# Altium PCB CH32V208W-NFC-R0-1v5.PcbDoc (part 2 of 2)
Units mil, origin at the board's own origin, x right, y up, seen from the top; angles counter-clockwise.
Board outline 2756.07 x 4438.27 mil, 2 copper layers (Top Layer, Bottom Layer); 80 components, 93 nets, 303 pads, 633 vias.
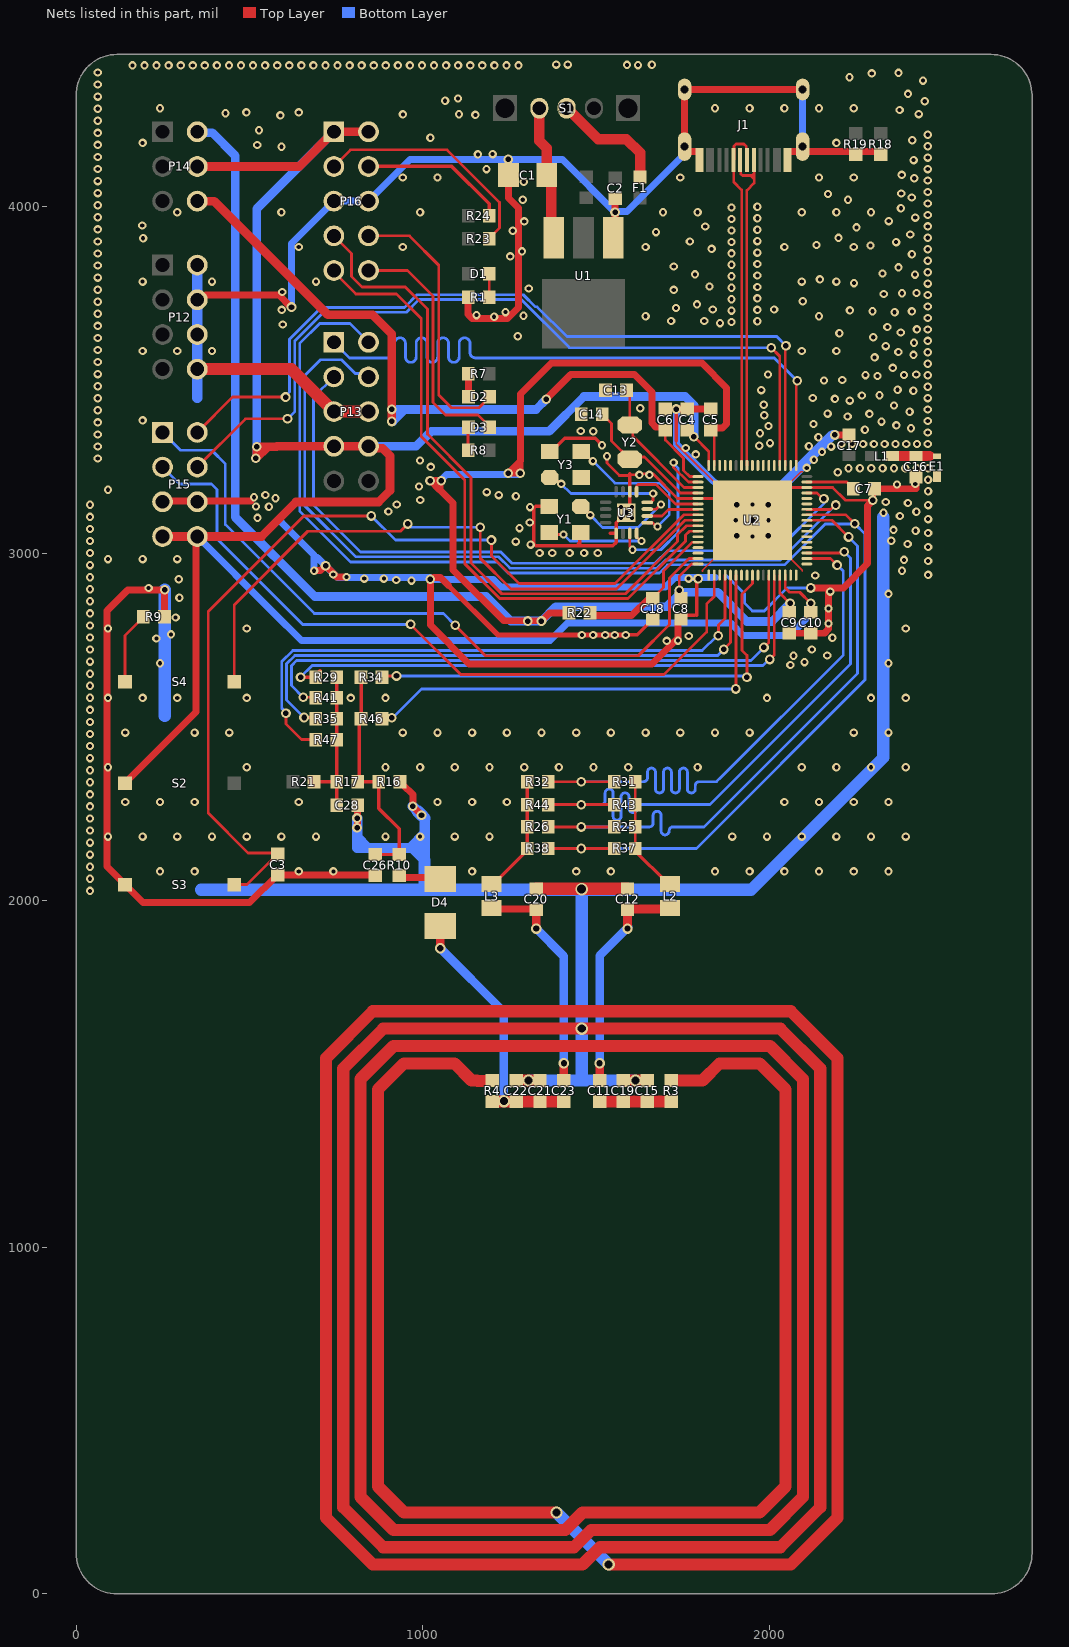
[diagram p2: the nets of this part, all layers, seen from the top]

## Via types
v1: diameter 24, hole 12, Top Layer to Bottom Layer, tented both sides, 537 vias
v2: diameter 28, hole 16, Top Layer to Bottom Layer, tented both sides, 80 vias
v3: diameter 35.43, hole 23.62, Top Layer to Bottom Layer, tented both sides, 6 vias
v4: diameter 30, hole 18, Top Layer to Bottom Layer, tented both sides, 5 vias
v5: diameter 20, hole 12, Top Layer to Bottom Layer, tented both sides, 4 vias
v6: diameter 36, hole 26, Top Layer to Bottom Layer, tented both sides, 1 vias

## Nets (pads, with @x,y where several pads share a name; then routed paths per layer and width w, separated by ;. In a path a pad name is that pad's centre, name@x,y a point inside that pad or via, vN(x,y) a via of type N, cw(c..) or ccw(c..) an arc to the next point about the centre after c; other vN are vias at no path point) (continued)
GND: C1.2 C2.2 C3.1 C4.2 C5.1 C6.2 C7.2 C8.2 C9.2 C10.1 C12.1 C13.1 C14.1 C15.1 C16.1 C17.1 C18.2 C19.1 C20.2 C21.2 C22.2 C26.1 C28.1 E1.0 J1.0 J1.A1 J1.B1 P12.2 P12.4 P12.6 P12.8 P13.5 P13.6 P15.5 P15.6 P16.5 P16.6 R1.1 R3.2 R4.2 R9.1 R16.1 R18.2 R19.2 S3.1 U1.1 U2.0 U2.5 U2.49 U3.0 U3.6 U3.13 Y1.2 Y1.4 Y3.2 Y3.4 | length 40721.1
  Top Layer w5: 1730.65,3324.41 1730.65,3314.41 1886.93,3158.13 U2.0@1904.91,3140.16 U2.0@1949.92,3095.14 ; 1806,2948.77 1806,2951.22 U2.0@1904.91,3050.12 U2.0@1949.92,3095.14 ; 2093.84,2948.77 2093.84,2951.22 U2.0@1994.94,3050.12 U2.0@1949.92,3095.14 ; 2094.89,3235.06 2089.84,3235.06 2044.41,3189.63 U2.0@1994.94,3140.16 U2.0@1949.92,3095.14
  Top Layer w8: v1(1530.59,3279.88) 1530.59,3260.07 1566.17,3224.48 1596.43,3224.48 ; 1596.43,3226.12 v1(1623.91,3226.12) ; 1637.61,3229.16 1662.93,3229.16 1733.96,3158.13 U2.5@1793.14,3158.13 U2.0@1886.93,3158.13 ; U2.0@2044.41,3189.63 U2.49@2106.7,3189.63 2181.11,3189.63 2217.96,3152.78 v2(2296.85,3152.78) 2301.54,3157.46 C7.2@2301.54,3186.12
  Top Layer w10: 1073.17,2907.57 1078.39,2907.57 ; Y1.2@1364.1,3135.19 1324.83,3135.19 1318.97,3129.33 1318.97,3027.84 1324.83,3021.98 1443.89,3021.98 ; Y3.4@1365.79,3292.9 1369.72,3292.9 1408.39,3331.57 1496.22,3331.57 v1(1516.09,3311.7) ; Y1.4@1454.65,3060.39 1459.87,3055.17 1451.5,3046.8 1451.5,3029.6 1443.89,3021.98 ; 1539.75,3057.33 U3.13@1557.06,3057.33 ; v1(1584.61,2764.64) 1617.33,2764.64 1647.89,2795.2 1647.89,2796.19 1661.2,2809.49 C18.2@1662.18,2809.49 ; 1596.43,3229.16 1596.43,3226.12 1596.43,3224.48 U3.6@1596.43,3177.5 1596.43,3127.26 U3.0@1586.58,3117.42 1557.06,3087.89 U3.13@1557.06,3057.33 ; 1730.65,3324.41 v2(1730.65,3415.75) v2@1730.65,3425.75 ; C8.2@1755.91,2809.49 1755.91,2818.64 1758.2,2820.93 1783.28,2820.93 ; 1789.14,2820.93 v2@1789.14,2926.72 ; 1443.89,3021.98 1547.79,3021.98 1557.06,3031.25 U3.13@1557.06,3057.33
  Top Layer w15: 1073.17,2907.57 1216.1,2764.64 v1(1458.16,2764.64) v1(1490.59,2764.64) v1(1525.64,2764.64) v1(1553.11,2764.64) v1@1578.91,2764.64
  Top Layer w20: P15.5@249.55,3148.48 252.16,3151.09 503.84,3151.09 ; R9.1@254.77,2817.08 v2@254.77,2893.94 ; v2(255.54,2894.71) v2@254.77,2893.94 ; P12.4@349.55,3730.82 360.37,3730.82 373.63,3744.07 584.72,3744.07 618.96,3709.83 v2(621.13,3709.83) ; v1(686.26,2949.8) 704.92,2949.8 v2@717.95,2962.83 ; v2(719.29,2964.16) v1@740.75,2942.7 ; v1@740.75,2940.03 v1@740.75,2942.7 ; v1(779.6,2931.83) 751.62,2931.83 v1@740.75,2942.7 ; v2(810.25,2208.78) 811.04,2209.56 C28.1@811.04,2272.56 ; v2(810.25,2236.81) 811.04,2237.6 C28.1@811.04,2272.56 ; C28.1@811.82,2273.35 C28.1@811.04,2272.56 ; C26.1@862.83,2072.39 C3.1@581.24,2072.39 580.26,2072.39 500.61,1992.74 193.42,1992.74 S3.1@141.31,2044.86 89.55,2096.61 89.55,2834.38 149.12,2893.94 v2@254.77,2893.94 ; R16.1@933.62,2341.44 933.62,2340.46 941.93,2332.15 942.91,2332.15 970.95,2304.12 v2(970.95,2270.38) 995.86,2245.47 v2(995.86,2245.24) ; v2(1021.23,2925.03) 1021.23,2792.86 1132.98,2681.1 1659.76,2681.1 1734.8,2756.15 1734.8,2801.19 1743.11,2809.49 C8.2@1743.91,2809.49 ; v2@1030.23,2930.03 1050.7,2930.03 1073.17,2907.57 ; R1.1@1130.28,3738.12 1130.28,3689.11 1141.99,3677.39 1244.27,3677.39 1275.92,3709.04 1275.92,3995.02 1246.19,4024.75 C1.2@1246.19,4091.03 ; v2(1246.19,4135.34) C1.2@1246.19,4091.03 ; C1.2@1246.88,4090.34 C1.2@1246.19,4091.03 ; U1.1@1548.91,3910.12 1553.91,3915.12 v2(1553.91,3983.19) C2.2@1553.91,4022.12 ; v2(1730.65,3415.75) C4.2@1762.47,3415.75 C5.1@1829.91,3415.75 ; J1.B1@1797.41,4134.12 1797.41,4156.76 1795.6,4158.57 1763.25,4158.57 1754.3,4167.52 J1.0@1754.3,4172.31 J1.0@1754.3,4336.88 J1.0@2094.46,4336.88 ; J1.A1@2051.35,4134.12 2051.35,4156.76 2053.16,4158.57 J1.0@2085.51,4158.57 ; C9.2@2055.91,2769.49 2157.35,2769.49 2169.07,2781.21 v1(2169.07,2840.69) v1@2169.07,2900.18 ; J1.0@2094.46,4172.31 2094.46,4167.52 J1.0@2085.51,4158.57 ; v2@2127.91,2900.18 v1@2169.07,2900.18 ; v2(2187.29,3341.12) 2187.29,3340.75 C17.1@2228.41,3340.75 ; v2(2296.85,3152.78) 2296.85,3152.03 2281.88,3137.06 2281.88,2970.02 2212.04,2900.18 v1@2169.07,2900.18 ; C7.2@2301.54,3186.12 2421.34,3186.12 C16.1@2421.34,3219.66 ; R18.2@2319.91,4149.49 2311.6,4157.8 2086.28,4157.8 J1.0@2085.51,4158.57
  Top Layer w35: P12.8@349.55,3530.82 620.82,3530.82 P13.5@743.16,3408.48 P13.6@843.16,3408.48 ; 1156,1480 1156.12,1480 1157.05,1479.07 1186.24,1479.07 1186.66,1479.49 1199.51,1479.49 R4.2@1200.32,1480.3 ; 1156,1480.3 1140.32,1480.3 1090.95,1529.67 945.32,1529.67 870.32,1454.67 870.32,309.67 945.32,234.67 v3(1385.32,234.67) ; C22.2@1268.99,1480.3 C21.2@1337.65,1480.3 ; C20.2@1326.51,2033.08 C12.1@1589.84,2033.08 ; v3(1535.32,84.67) 2060.32,84.67 2195.32,219.67 2195.32,1544.67 2060.32,1679.67 855.32,1679.67 720.32,1544.67 720.32,219.67 855.32,84.67 1460.32,84.67 1510.32,134.67 2030.32,134.67 2145.32,249.67 2145.32,1514.67 2030.32,1629.67 v3(1457.82,1629.67) 885.32,1629.67 770.32,1514.67 770.32,249.67 885.32,134.67 1435.32,134.67 1485.32,184.67 2000.32,184.67 2095.32,279.67 2095.32,1484.67 2000.32,1579.67 915.32,1579.67 820.32,1484.67 820.32,279.67 915.32,184.67 1410.32,184.67 1460.32,234.67 1970.32,234.67 2045.32,309.67 2045.32,1454.67 1970.32,1529.67 1855.32,1529.67 1805.95,1480.3 R3.2@1715.32,1480.3 ; C19.1@1577.99,1480.3 C19.1@1594.62,1480.3 ; v3@1617,1480 v3(1613,1480) 1594.92,1480 C19.1@1594.62,1480.3 ; C15.1@1646.65,1480.3 C19.1@1594.62,1480.3
  Bottom Layer w8: 1875.29,2935.12 1927.19,2883.23 1927.19,2856.47 1949.62,2834.04 1983.84,2834.04 2049.98,2900.18 v2(2117.91,2900.18) v2@2127.91,2900.18
  Bottom Layer w20: 592.64,3090.81 592.64,3088.14 686.26,2994.53 v1(686.26,2949.8) ; v2(621.13,3709.83) 621.13,3893.12 P16.5@743.16,4015.15 P16.6@843.16,4015.15 963.35,4135.34 v2(1246.19,4135.34) 1401.75,4135.34 v2(1553.91,3983.19) 1555.44,3984.72 1588.36,3984.72 1754.3,4150.66 J1.0@1754.3,4172.31 ; 695.32,2988.13 v2(719.29,2964.16) 753.42,2930.03 923.01,2930.03 v2@1021.23,2930.03 ; 1002.85,2150.35 1004.95,2148.25 ; v2@1021.23,2928.73 1024.92,2925.03 1202.84,2925.03 1225.47,2902.41 1699.09,2902.41 1726.29,2929.61 v1@1762.11,2929.61 ; v2(1730.65,3415.75) 1730.65,3314.41 1773.21,3271.85 U2.0@1904.91,3140.16 ; v1(1765.91,2926.9) 1764.82,2926.9 v1@1762.11,2929.61 ; 1842.82,2929.61 1793.14,2929.61 v1@1762.11,2929.61 ; J1.0@2094.46,4172.31 J1.0@2094.46,4336.88
  Bottom Layer w30: 349.55,3448.48 P12.8@349.55,3530.82 P12.6@349.55,3630.82 P12.4@349.55,3730.82 P12.2@349.55,3830.82 ; v2(810.25,2236.81) v2(810.25,2208.78) 810.25,2180.75 ; v2(970.95,2270.38) 984.25,2257.08 ; 1002.85,2150.35 969.96,2150.35 ; v2@1004.95,2236.38 1004.95,2192.31 ; U2.0@1994.94,3140.16 1994.94,3153.96 2182.1,3341.12 v2(2187.29,3341.12) ; 810.25,2180.75 840.64,2150.35 ; 810.25,2180.75 810.25,2150.35 840.64,2150.35 ; 840.64,2150.35 962.99,2150.35 ; 962.99,2150.35 969.96,2150.35 ; 962.99,2150.35 1004.95,2192.31 ; 969.96,2150.35 1004.95,2115.37 1004.95,2148.25 1004.95,2192.31
  Bottom Layer w35: 255.54,2531.18 v2(255.54,2894.71) ; 359.99,2030.22 1004.95,2030.22 ; 984.25,2257.08 995.98,2245.35 v2@1004.95,2236.38 ; 1004.95,2115.37 1004.95,2030.22 ; v3@1310.22,1480.12 1457.64,1480.12 1457.82,1480.3 ; v3(1385.32,234.67) v3(1535.32,84.67) ; v6@1457.82,2030.22 v3(1457.82,1629.67) 1457.82,1480.3 ; v3(1613,1480) 1612.7,1480.3 1457.82,1480.3 ; v1@2326.98,3105.11 2326.98,2410.95 1946.24,2030.22 1459.85,2030.22 1458.28,2031.79 1458.09,2031.79 1457.82,2031.52 1457.55,2031.79 1457.36,2031.79 1455.79,2030.22 1004.95,2030.22
  other v1: 40.19,2026.9 40.19,2061.67 241.91,2083.12 341.91,2083.12 641.91,2083.12 741.91,2083.12 1141.91,2083.12 1441.91,2083.12 1541.91,2083.12 1841.91,2083.12 1941.91,2083.12 2041.91,2083.12 2141.91,2083.12 2241.91,2083.12 2341.91,2083.12 40.19,2096.45 40.19,2131.23 40.19,2166.01 91.91,2183.12 191.91,2183.12 291.91,2183.12 391.91,2183.12 491.91,2183.12 591.91,2183.12 691.91,2183.12 891.91,2183.12 991.91,2183.12 1091.91,2183.12 1191.91,2183.12 1891.91,2183.12 1991.91,2183.12 2091.91,2183.12 2191.91,2183.12 2291.91,2183.12 2391.91,2183.12 40.19,2200.79 40.19,2235.56 40.19,2270.34 141.91,2283.12 241.91,2283.12 341.91,2283.12 641.91,2283.12 1041.91,2283.12 1141.91,2283.12 1241.91,2283.12 2041.91,2283.12 2141.91,2283.12 2241.91,2283.12 2341.91,2283.12 40.19,2305.12 40.19,2339.9 40.19,2374.68 91.91,2383.12 491.91,2383.12 891.91,2383.12 991.91,2383.12 1091.91,2383.12 1191.91,2383.12 1291.91,2383.12 1391.91,2383.12 1491.91,2383.12 1591.91,2383.12 1791.91,2383.12 2091.91,2383.12 2191.91,2383.12 2291.91,2383.12 2391.91,2383.12 40.19,2409.46 40.19,2444.23 40.19,2479.01 141.91,2483.12 341.91,2483.12 441.91,2483.12 941.91,2483.12 1041.91,2483.12 1141.91,2483.12 1241.91,2483.12 1341.91,2483.12 1441.91,2483.12 1541.91,2483.12 1641.91,2483.12 1741.91,2483.12 1841.91,2483.12 1941.91,2483.12 2241.91,2483.12 2341.91,2483.12 40.19,2513.79 40.19,2548.57 40.19,2583.35 91.91,2583.12 191.91,2583.12 291.91,2583.12 491.91,2583.12 791.91,2583.12 891.91,2583.12 1991.91,2583.12 2291.91,2583.12 2391.91,2583.12 40.19,2618.12 40.19,2652.9 2059.3,2677.93 241.91,2683.12 2341.91,2683.12 2099.83,2686.28 40.19,2687.68 2068.24,2704.76 2165.4,2705.35 40.19,2722.46 2121.29,2722.64 1702.73,2747.52 1735.26,2748.18 231.5,2754.39 2180.3,2756.62 40.19,2757.24 1766.47,2761.46 273.71,2766.21 91.91,2783.12 491.91,2783.12 2391.91,2783.12 40.19,2792.02 2168.97,2797.74 287.08,2815.12 40.19,2826.79 40.19,2861.57 297.83,2871.98 2341.91,2883.12 2174.34,2889.54 40.19,2896.35 209.38,2899.81 966.85,2921.16 923.01,2922.97 295.97,2925.17 830.62,2926.95 887.32,2927.03 40.19,2931.13 2130.77,2935.94 2456.27,2937.7 741.52,2938.8 2380.82,2949.88 40.19,2965.91 2456.27,2977.91 2387,2981.09 91.91,2983.12 191.91,2983.12 291.91,2983.12 40.19,3000.68 1336.53,3000.81 1372.62,3000.81 1423,3000.81 1464.73,3000.81 1503.83,3000.81 2456.27,3018.13 1310.49,3024.94 2397.23,3026.97 1267.66,3033.7 40.19,3035.46 2350.29,3036.27 1949.92,3048.14 2456.27,3058.35 2420.23,3064.8 2356.46,3067.49 40.19,3070.24 1278.24,3072.48 1307.87,3088.9 1901.92,3095.14 1995.92,3095.14 2456.27,3098.56 523.11,3102.1 40.19,3105.02 2374.89,3107.4 2327.94,3116.71 2422.57,3119.6 900.28,3120.6 1308.59,3133.04 555.97,3134.39 518.89,3134.95 2456.27,3138.78 40.19,3139.8 924.69,3140.75 1949.92,3141.14 2397.89,3145.24 2334.12,3147.92 992.08,3153.7 574.97,3158.71 512.8,3161.55 1267.94,3164.45 1218.46,3167.59 545.7,3168.21 1183.91,3176.23 2456.27,3178.99 91.91,3183.12 988.92,3192.4 2366.62,3198.09 2419.06,3199.84 2456.27,3212 1652.7,3226.12 2195.95,3233.62 2226.79,3245.01 2259.57,3245.01 2292.36,3245.01 2325.14,3245.01 2357.92,3245.01 2390.7,3245.01 2423.49,3245.01 2456.27,3245.01 2106.7,3246.27 1022.69,3249.03 991.81,3267.32 2127.05,3269.72 62.58,3273.06 1786.45,3285.08 2150.21,3292.29 1757.78,3303.7 2176.73,3307.53 62.58,3307.84 2112.57,3308.41 1969.55,3309.97 2206.81,3315.26 2237.86,3315.26 2268.92,3315.26 2299.97,3315.26 2331.02,3315.26 2362.08,3315.26 2393.13,3315.26 2424.18,3315.26 2455.23,3315.26 2000.36,3317.53 2140,3334.6 62.58,3342.62 1971.89,3346 2455.23,3348.27 1455.06,3352.47 1490.93,3351.66 2274.03,3356.01 2407.2,3360.36 1996.45,3366.9 2364.89,3368.77 2125.9,3372.92 62.58,3377.4 2322.03,3379.48 2455.23,3381.27 191.91,3383.12 2224.33,3394.09 1984.17,3397.98 2287.06,3402.04 2166.58,3402.68 2403.05,3407.85 62.58,3412.17 2455.23,3414.28 1626.57,3418.19 2357.82,3426.14 1982.34,3428.02 2230.53,3440.05 2187.53,3445.13 62.58,3446.95 2455.23,3447.29 2123.76,3447.81 2265.43,3455.13 2316.39,3455.61 2413.73,3468.4 1975.27,3470.28 2368.49,3471.63 2455.23,3480.3 62.58,3481.73 2156.26,3497.99 2208.7,3499.73 2310.19,3510.88 2455.23,3513.31 2276.02,3513.67 2387.03,3513.76 1994.7,3515.58 62.58,3516.51 2422.01,3515.65 2354.17,3534.56 2455.23,3546.32 62.58,3551.29 2302.18,3564.74 2414.14,3572.09 2455.23,3579.33 2370.6,3580.35 191.91,3583.12 291.91,3583.12 391.91,3583.12 2091.91,3583.12 2191.91,3583.12 62.58,3586.07 2334.44,3597.16 2415.45,3606.87 2455.23,3612.34 62.58,3620.84 2298.26,3622.65 1273.46,3625.5 2200.59,3634.25 2377.36,3636.3 2423.98,3645.59 2455.23,3645.35 2338.95,3652.42 62.58,3655.62 596.13,3659.44 1856.31,3663.59 1889.36,3666.54 1715.49,3669.5 1964.19,3668.77 1811.2,3669.64 2455.23,3678.36 1205.33,3681.88 1641.91,3683.12 2141.91,3683.12 1289.9,3685.01 1154.44,3686.58 62.58,3690.4 1238.22,3695.19 2359.89,3694.86 2296.12,3697.55 2409.54,3697.44 1889.36,3699.55 2230.69,3700.27 592.99,3701.8 1964.19,3701.78 1835.62,3702.78 2012.33,3702.79 1729.75,3707.34 2455.23,3711.37 1790.09,3717.58 62.58,3725.18 2094.73,3726.36 1889.36,3732.56 1964.19,3734.79 2455.23,3744.38 2328.62,3747.72 2381.07,3749.47 2422.69,3750.6 594.62,3753.41 1723.12,3759.49 62.58,3759.96 1305.03,3763.43 1889.36,3765.57 1964.19,3767.8 1826.14,3769.23 2455.23,3777.39 2242.64,3778.91 191.91,3783.12 391.91,3783.12 691.91,3783.12 2091.91,3783.12 2191.91,3783.12 2144.22,3789.6 62.58,3794.73 1889.36,3798.58 1964.19,3800.81 2418.73,3803.42 1784.39,3804.11 2325.05,3806.59 2455.23,3810.4 2371.04,3824.14 1722.92,3826.88 62.58,3829.51 1889.36,3831.59 1964.19,3833.82 2455.23,3843.41 1251.95,3855.86 2409.49,3862.18 62.58,3864.29 1889.36,3864.6 1964.19,3866.83 1285.35,3870.27 2455.23,3876.42 1832.37,3877.53 641.91,3883.12 941.91,3883.12 1641.91,3883.12 2041.91,3883.12 2241.91,3883.12 2290.45,3887.11 2134.6,3888.58 1889.36,3897.61 2364.23,3897.11 1769.59,3898.6 62.58,3899.07 1964.19,3899.84 193.45,3908.42 2197.84,3909.2 2455.23,3909.43 2404.87,3918.96 1671.69,3925.92 1258.91,3929.63 1889.36,3930.62 1964.19,3932.85 62.58,3933.85 2250.08,3939.45 1813.99,3941.86 2455.23,3942.44 190.78,3944.88 1292.01,3956.92 2343.04,3957.65 1889.36,3963.63 1964.19,3965.86 2419.06,3967.61 62.58,3968.63 2455.23,3975.45 291.91,3983.12 591.91,3983.12 991.91,3983.12 1691.91,3983.12 1791.91,3983.12 2091.91,3983.12 2191.91,3983.12 2291.91,3983.12 2377.85,3994.48 1889.36,3996.64 1964.19,3998.87 62.58,4003.4 2455.23,4008.46 1287.99,4019.1 2225.33,4019.19 2409.18,4025.79 2167.59,4035.68 2379.03,4037.36 62.58,4038.18 2455.23,4041.47 1290.88,4071.12 62.58,4072.96 2455.23,4074.48 2416.23,4081.13 941.91,4083.12 1041.91,4083.12 1741.91,4083.12 2141.91,4083.12 2241.91,4083.12 2380.25,4090.87 1183.18,4107.36 2455.23,4107.49 62.58,4107.74 2414.62,4133.36 2455.23,4140.5 62.58,4142.52 1158.29,4149.93 1200.86,4150.59 592.26,4171.96 2455.23,4173.51 62.58,4177.29 522.21,4177.25 191.91,4183.12 2191.91,4183.12 2410.65,4190.59 1021.4,4197.74 2455.23,4206.51 62.58,4212.07 527.5,4219.55 62.58,4246.85 588.96,4262.5 1151.08,4263.89 942.16,4265.2 1103.93,4265.86 2429.5,4265.98 431.01,4268.45 491.15,4271.09 641.83,4271.09 2374.17,4278.14 62.58,4281.63 241.91,4283.12 1841.91,4283.12 1941.91,4283.12 2041.91,4283.12 2141.91,4283.12 2241.91,4283.12 2446.52,4303.07 1063.98,4304.5 1101.31,4311.05 62.58,4316.41 2398.49,4324.35 62.58,4351.19 2441.66,4362.66 2229.46,4372.51 2294.07,4383.5 2371.06,4384.88 62.58,4385.96 162.58,4406.53 197.36,4406.53 232.13,4406.53 266.91,4406.53 301.69,4406.53 336.47,4406.53 371.25,4406.53 406.03,4406.53 440.8,4406.53 475.58,4406.53 510.36,4406.53 545.14,4406.53 579.92,4406.53 614.69,4406.53 649.47,4406.53 684.25,4406.53 719.03,4406.53 753.81,4406.53 788.59,4406.53 823.36,4406.53 858.14,4406.53 892.92,4406.53 927.7,4406.53 962.48,4406.53 997.25,4406.53 1032.03,4406.53 1066.81,4406.53 1101.59,4406.53 1136.37,4406.53 1171.15,4406.53 1205.92,4406.53 1240.7,4406.53 1275.48,4406.53 1620.07,4407.23 1588.41,4408.02 1660.11,4408.15 1384.39,4408.75 1417.4,4408.75
  other v2: 1793.14,2926.72
  other v3: 1304.22,1480.12
  other v5: 1570.86,3101.47 1602.3,3101.47 1570.86,3133.36 1602.3,3133.36
  other v6: 1457.82,2031.98
INT_OUT_0: L2.1 R25.2 R31.2 R37.2 R43.2 | length 331.8
  Top Layer w8: R37.2@1611.91,2149.03 R25.2@1611.91,2211.24 R43.2@1611.91,2275.45 R31.2@1611.91,2341.66
  Top Layer w10: R37.2@1608.33,2145.45 L2.1@1706.72,2047.06
INT_OUT_1: L3.1 R26.1 R32.1 R38.1 R44.1 | length 453.3
  Top Layer w10: L3.1@1203.92,2047.06 R38.1@1303.4,2146.53 ; R38.1@1300.91,2149.03 R26.1@1300.91,2211.24 R44.1@1300.91,2275.45 R32.1@1300.91,2341.66 R26.1@1300.91,2227.8
  Top Layer w20: L3.1@1197.82,2047.06 L3.1@1203.92,2047.06
LED1: D2.2 P16.8 | length 787.5
  Top Layer w8: P16.8@843.16,3915.15 961.08,3915.15 1045.74,3830.49 1045.74,3455.93 1082.02,3419.65 1161.47,3419.65 1192.28,3450.47 D2.2@1192.28,3451.46
LED2: D3.2 P16.10 | length 716.3
  Top Layer w8: P16.10@843.16,3815.15 955.31,3815.15 1028.91,3741.55 1028.91,3434.87 1064.97,3398.81 1158.25,3398.81 1192.28,3364.77 D3.2@1192.28,3363.79
NetC11_1: C11.1 C12.2 L2.2 | length 663.2
  Top Layer w25: C11.1@1509.32,1480.3 v4(1509.32,1529.67) ; v4(1589.84,1918.08) C12.2@1589.84,1972.45 1592.1,1974.72 1710.56,1974.72 L2.2@1712.82,1976.98
  Bottom Layer w25: v4(1509.32,1529.67) 1509.32,1839.87 1585.03,1915.58 1585.99,1915.58 1588.69,1918.28 v4@1588.69,1919.24 ; v4@1588.21,1918.76 v4@1588.69,1919.24 ; v4@1588.69,1919.24 1592.34,1922.89 1592.34,1921.93 1589.64,1919.24 v4@1588.69,1919.24
NetC11_2: C11.2 C15.2 C19.2 R3.1 | length 206
  Top Layer w35: C11.2@1509.32,1419.67 C19.2@1577.99,1419.67 C15.2@1646.65,1419.67 R3.1@1715.32,1419.67
NetC16_2: C16.2 E1.1 L1.2 | length 106.1
  Top Layer w28.1: L1.2@2354.9,3280.12 2461.01,3280.12
NetC20_1: C20.1 C23.1 L3.2 | length 656
  Top Layer w20: L3.2@1197.82,1976.98 1200.08,1974.72 1324.24,1974.72 C20.1@1326.51,1972.45
  Top Layer w25: v4(1326.51,1918.08) C20.1@1326.51,1972.45 ; C23.1@1406.32,1480.3 v4(1406.32,1529.67)
  Bottom Layer w25: v4@1326.36,1918.23 1406.32,1838.27 v4(1406.32,1529.67)
NetC21_1: C21.1 C22.1 C23.2 D4.1 R4.1 | length 787.4
  Top Layer w25: v4(1049.91,1861.12) D4.1@1049.91,1926.12
  Top Layer w35: R4.1@1200.32,1419.67 C23.2@1406.32,1419.67
  Bottom Layer w25: v4(1049.91,1861.12) 1233.42,1677.6 v3(1233.42,1420.69)
NetD1_2: D1.2 R1.2 | length 68
  Top Layer w8: R1.2@1190.91,3738.12 D1.2@1190.91,3806.12
NetD2_1: D2.1 R7.2 | length 67.2
  Top Layer w20: R7.2@1130.28,3518.12 1130.96,3517.43 1130.96,3452.14 D2.1@1131.65,3451.46
NetD3_1: D3.1 R8.2 | length 67.2
  Top Layer w8: R8.2@1130.28,3297.12 1130.28,3362.41 D3.1@1131.65,3363.79
NetD4_2: D4.2 R10.1 | length 120.5
  Top Layer w20: R10.1@931.43,2065.98 1045.05,2065.98 D4.2@1049.91,2061.12
NetF1_2: F1.2 S1.1 | length 334.6
  Top Layer w30: S1.1@1414.17,4283.12 1415.45,4283.12 1504.74,4193.83 1586.36,4193.83 1625.91,4154.29 F1.2@1625.91,4084.75
NetP16_3: P16.3 R23.2 | length 677.6
  Top Layer w8: P16.3@743.16,4115.15 791.04,4163.03 1069.75,4163.03 1221.02,4011.75 1221.02,3938.13 1190.91,3908.01 R23.2@1190.91,3907.03
NetP16_4: P16.4 R24.1 | length 426.7
  Top Layer w10: P16.4@843.16,4115.15 1083.03,4115.15 1190.91,4007.27 R24.1@1190.91,3973.03
NetR9_2: R9.2 S4.2 | length 208.8
  Top Layer w8: S4.2@141.31,2630.12 141.31,2763.26 194.14,2816.09 R9.2@194.14,2817.08
NRST: C3.2 S3.2 U2.8 | length 2707
  Top Layer w8: S3.2@456.27,2044.86 493.08,2044.86 C3.2@581.24,2133.02 577.97,2136.29 496.04,2136.29 381.11,2251.22 381.11,2832.33 656.48,3107.7 v2(851.18,3107.7) ; v2(1197.41,3038.08) 1197.41,2992.76 1277.22,2912.95 1553.95,2912.95 1751.89,3110.89 U2.8@1793.14,3110.89
  Bottom Layer w8: v2(851.18,3107.7) 920.8,3038.08 v2(1197.41,3038.08)
OPA_N: C28.2 R17.1 R21.2 R29.1 R35.1 R41.1 R47.1 | length 438.8
  Top Layer w10: R21.2@686.15,2341.44 742.42,2341.44 R17.1@751.34,2350.36 ; R29.1@746.91,2641.12 751.34,2636.69 R41.1@751.34,2583.02 R35.1@751.34,2523.02 R47.1@751.34,2463.02 R17.1@751.34,2350.36 ; C28.2@751.19,2273.35 R17.1@751.19,2341.44 751.19,2341.53 R17.1@751.34,2341.68 ; R17.1@751.34,2341.44 R17.1@751.34,2341.68 ; R17.1@751.34,2341.68 R17.1@751.34,2350.36
OPA_P: C26.2 R10.2 R16.2 R17.2 R34.1 R46.1 | length 667.4
  Top Layer w10: R34.1@824.57,2639.79 821.65,2636.87 R46.1@821.65,2523.02 816.44,2517.8 816.44,2346.06 R17.2@811.82,2341.44 R16.2@872.99,2341.44 872.99,2264.35 931.43,2205.91 R10.2@931.43,2131.65 C26.2@862.83,2131.65
PA0: U2.14
PA1: U2.15
PA2: P15.1 U2.16 | length 2107.3
  Top Layer w8: v2(1092.79,2792.72) 1180.83,2704.68 1620.86,2704.68 1711.1,2794.92 1711.1,2928.59 1767.41,2984.9 U2.16@1793.14,2984.9
  Bottom Layer w8: P15.1@249.55,3348.48 300.94,3297.09 391.23,3297.09 430.44,3257.88 430.44,3082.69 686.97,2826.16 1059.35,2826.16 v2(1092.79,2792.72)
PA3: P15.3 U2.19 | length 2123.2
  Top Layer w8: v2(964.29,2795.08) 1109.06,2650.31 1695.32,2650.31 1817.94,2772.92 1817.94,2854.11 1839.69,2875.86 U2.19@1839.69,2936.96
  Bottom Layer w8: P15.3@249.55,3248.48 297.9,3200.13 390.64,3200.13 406.72,3184.06 406.72,3041.99 653.63,2795.08 v2(964.29,2795.08)
PA4: U2.20
PA5: R47.2 U2.21 | length 1761.7
  Top Layer w8: v2(605.11,2538.62) 605.11,2507.57 649.66,2463.02 R47.2@690.71,2463.02 ; v2(1851.75,2761.92) 1851.75,2792.96 1871.18,2812.4 U2.21@1871.18,2936.96
  Bottom Layer w8: v2(605.11,2538.62) 605.11,2541.14 592.94,2553.3 592.94,2687.51 624.97,2719.53 1805.02,2719.53 1847.4,2761.92 v2(1851.75,2761.92)
PA6: R35.2 U2.22 | length 1710.4
  Top Layer w8: v2(657.44,2526.62) 687.11,2526.62 R35.2@690.71,2523.02 ; v2(1867.33,2722.92) 1886.93,2742.52 U2.22@1886.93,2936.96
  Bottom Layer w8: v2(657.44,2526.62) 606.94,2577.12 606.94,2681.71 630.76,2705.53 1849.94,2705.53 v2(1867.33,2722.92)
PA7: R46.2 U2.23 | length 1383.4
  Top Layer w8: R46.2@882.28,2523.02 885.39,2526.12 v2(909.91,2526.12) ; v2(1901.62,2608.98) 1902.68,2610.04 U2.23@1902.68,2936.96
  Bottom Layer w8: v2(909.91,2526.12) 913.53,2526.12 996.38,2608.98 v2(1901.62,2608.98)
PA8: R25.1 R26.2 U2.43 | length 1820.1
  Top Layer w8: R26.2@1361.54,2211.24 v2(1456.41,2211.24) R25.1@1551.28,2211.24 ; U2.43@2106.7,3095.14 2178.89,3095.14 v2(2226.91,3047.12)
  Bottom Layer w8: v2(1456.41,2211.24) 1648.13,2211.24 1652.13,2211.24 ccw(c1652.13,2222.74) 1663.63,2222.74 1663.63,2244.74 cw(c1675.13,2244.74) 1686.63,2244.74 1686.63,2199.68 ccw(c1698.13,2199.68) 1709.63,2199.68 1709.63,2199.74 cw(c1721.13,2199.74) 1721.13,2211.24 1798.21,2211.24 1810.16,2211.24 2252.91,2653.98 2252.91,3021.12 v2(2226.91,3047.12)
PA9: P13.2 R37.1 R38.2 U2.44 | length 4281.6
  Top Layer w8: R38.2@1361.54,2149.03 v2(1456.41,2149.03) R37.1@1551.28,2149.03 ; U2.44@2106.7,3110.89 2219.14,3110.89 v2(2244.91,3085.12)
  Bottom Layer w8: P13.2@843.16,3608.48 843.16,3609.32 789.86,3662.61 702.47,3662.61 644.75,3604.9 644.75,3121.67 791.68,2974.74 1213.78,2974.74 1245.35,2943.17 1681.45,2943.17 1705.1,2966.81 2042.6,2966.81 2159.91,3084.12 2243.91,3084.12 v2(2244.91,3085.12) 2274.68,3055.35 2274.68,2635.6 1788.11,2149.03 v2(1456.41,2149.03)
PA10: P13.4 U2.45 | length 2366.8
  Top Layer w8: U2.45@2106.7,3126.63 2175.22,3126.63 2187.71,3139.12 v2(2189.91,3139.12)
  Bottom Layer w8: P13.4@843.16,3508.48 833.21,3518.43 804.79,3518.43 765.43,3557.79 705.19,3557.79 659.47,3512.06 659.47,3137.02 806.74,2989.74 1218.58,2989.74 1251.15,2957.17 1675.65,2957.17 1699.3,2980.81 2030.6,2980.81 2188.91,3139.12 v2(2189.91,3139.12)
PA11: U2.46
PA12: U2.47
PA13: P13.3 U2.48 | length 2075.4
  Top Layer w8: U2.48@2106.7,3173.88 2136.15,3173.88 2152.91,3157.12 v2(2155.91,3157.12)
  Bottom Layer w8: P13.3@743.16,3508.48 684.78,3450.1 684.78,3139.38 820.42,3003.74 1224.38,3003.74 1256.95,2971.17 1669.86,2971.17 1706.03,3007.35 2020,3007.35 2155.91,3143.26 v2(2155.91,3157.12)
PA14: P13.1 U2.52 | length 2061
  Top Layer w8: U2.52@2075.91,3253.32 2075.91,3494.35 v2(2078.82,3497.27)
  Bottom Layer w8: P13.1@743.16,3608.48 788.31,3563.33 899.05,3563.33 903.05,3563.33 ccw(c903.05,3578.83) 918.55,3578.83 918.55,3605.84 cw(c934.05,3605.84) 949.55,3605.84 949.55,3566.03 ccw(c965.05,3566.03) 980.55,3566.03 980.55,3605.84 cw(c996.05,3605.84) 1011.55,3605.84 1011.55,3566.03 ccw(c1027.05,3566.03) 1042.55,3566.03 1042.55,3605.84 cw(c1058.05,3605.84) 1073.55,3605.84 1073.55,3566.03 ccw(c1089.05,3566.03) 1104.55,3566.03 1104.55,3605.69 cw(c1120.05,3605.69) 1135.55,3605.69 1135.55,3578.83 ccw(c1151.05,3578.83) 1151.05,3563.33 1212.68,3563.33 2012.77,3563.33 v2(2078.82,3497.27)
PA15: U2.53
PB0: R34.2 U2.26 | length 1369.9
  Top Layer w8: R34.2@881.97,2643.02 880.91,2644.08 883.17,2646.35 v2(923.78,2646.35) ; v2(1934.04,2642.38) 1934.04,2705.86 1920.1,2719.8 1920.1,2882.98 1949.86,2912.74 U2.26@1949.92,2936.96 U2.26@1949.92,2936.96
  Bottom Layer w8: v2(923.78,2646.35) 1930.08,2646.35 v2(1934.04,2642.38)
PB1: U2.27
PB3: U2.58
PB4: U2.59
PB5: U2.60
PB6: J1.A7 J1.B7 U2.61 | length 993.6
  Top Layer w8: J1.A7@1914.54,4134.12 1916.44,4132.22 1916.44,4093.81 1921.13,4089.12 1944.83,4089.12 ; U2.61@1934.17,3253.32 1934.17,3265 1933.8,3265.38 1933.8,3550.72 1933.8,4046.12 1954.86,4067.18 1954.86,4089.12 ; J1.B7@1953.91,4134.12 1954.86,4133.17 1954.86,4094.77 ; 1954.77,4079.19 1944.83,4089.12 ; 1944.83,4089.12 1949.21,4089.12 ; 1949.21,4089.12 1954.86,4089.12 ; 1949.21,4089.12 1954.86,4094.77 ; 1954.86,4089.12 1954.86,4094.77
PB7: J1.A6 J1.B6 U2.62 | length 1012.3
  Top Layer w8: U2.62@1918.43,3253.32 1918.43,3265 1918.8,3265.38 1918.8,3556.93 1918.8,4047.23 1895.91,4070.12 1895.91,4133.07 J1.B6@1894.85,4134.12 1896.76,4136.03 1896.76,4174.29 1902.59,4180.12 1924.91,4180.12 1932.32,4172.71 1932.32,4136.03 J1.A6@1934.22,4134.12
PB8: U2.64
PB9: U2.65
PB10: R41.2 U2.29 | length 1739.7
  Top Layer w8: v2(654.72,2585.11) 688.62,2585.11 R41.2@690.71,2583.02 ; v2(1983.02,2728.65) 1997.17,2742.79 U2.29@1997.17,2936.96
  Bottom Layer w8: v2(654.72,2585.11) 620.94,2618.89 620.94,2675.91 635.93,2690.9 1945.28,2690.9 v2(1983.02,2728.65)
PB11: R29.2 U2.30 | length 1719.3
  Top Layer w8: v2@1994.28,2688.49 v2(1999.91,2694.12) 2012.91,2707.13 U2.30@2012.91,2936.96
  Top Layer w10: v2(647.19,2643) 684.99,2643 704.02,2662.02 704.02,2656.33 R29.2@690.71,2643.02
  Bottom Layer w8: v2(647.19,2643) 681.09,2676.9 1980.36,2676.9 1997.58,2694.12 v2(1999.91,2694.12)
PB12: U2.35
PB13: R31.1 R32.2 U2.36 | length 1819.2
  Top Layer w8: R32.2@1361.54,2341.66 v2(1456.41,2341.66) R31.1@1551.28,2341.66 ; U2.36@2106.7,2984.9 2175.13,2984.9 v2(2193.91,2966.12)
  Bottom Layer w8: v2(1456.41,2341.66) 1631.83,2341.66 1635.83,2341.66 ccw(c1635.83,2353.16) 1647.33,2353.16 1647.33,2369.25 cw(c1658.83,2369.25) 1670.33,2369.25 1670.33,2320.56 ccw(c1681.83,2320.56) 1693.33,2320.56 1693.33,2369.25 cw(c1704.83,2369.25) 1716.33,2369.25 1716.33,2320.56 ccw(c1727.83,2320.56) 1739.33,2320.56 1739.33,2369.25 cw(c1750.83,2369.25) 1762.33,2369.25 1762.33,2320.56 ccw(c1773.83,2320.56) 1785.33,2320.56 1785.33,2330.16 cw(c1796.83,2330.16) 1796.83,2341.66 1846.59,2341.66 1858.65,2353.72 2211.91,2706.98 2211.91,2948.12 v2(2193.91,2966.12)
PB14: R43.1 R44.2 U2.37 | length 1819.1
  Top Layer w8: R44.2@1361.54,2275.45 v2(1456.41,2275.45) R43.1@1551.28,2275.45 ; U2.37@2106.7,3000.65 2211.43,3000.65 v2(2214.91,3004.12)
  Bottom Layer w8: v2(1456.41,2275.45) 1509.74,2275.45 1513.74,2275.45 ccw(c1513.74,2286.95) 1525.24,2286.95 1525.24,2308.95 cw(c1536.74,2308.95) 1548.24,2308.95 1548.24,2241.95 ccw(c1559.74,2241.95) 1571.24,2241.95 1571.24,2297.97 cw(c1582.74,2297.97) 1594.24,2297.97 1594.24,2263.95 ccw(c1605.74,2263.95) 1617.24,2263.95 cw(c1628.74,2263.95) 1628.74,2275.45 1655.59,2275.45 1827.38,2275.45 2232.87,2680.94 2232.87,2986.16 v2(2214.91,3004.12)
PB15: U2.38
PC0: S4.1 U2.9 | length 1867
  Top Layer w8: S4.1@456.27,2630.12 456.27,2851.74 668.06,3063.53 935.12,3063.53 v2(956.29,3084.7) ; v2(1165.22,3075.35) 1165.22,2985.73 1253.6,2897.34 1558.15,2897.34 1755.94,3095.14 U2.9@1793.14,3095.14
  Bottom Layer w8: v2(956.29,3084.7) 965.63,3075.35 v2(1165.22,3075.35)
PC1: P16.7 U2.10 | length 1964.2
  Top Layer w8: P16.7@743.16,3915.15 793.97,3864.34 793.97,3797.7 824.03,3767.63 949.12,3767.63 1013.03,3703.72 1013.03,3343.42 1138.69,3217.76 1138.69,2971.77 1227.11,2883.34 1583.44,2883.34 1734.25,3034.16 1734.25,3053.65 1759.99,3079.39 U2.10@1793.14,3079.39
PC2: P16.9 U2.11 | length 1875.2
  Top Layer w8: P16.9@743.16,3815.15 743.16,3810.92 806.6,3747.47 924.01,3747.47 995.09,3676.4 995.09,3337.19 1120.64,3211.64 1120.64,2970.01 1221.31,2869.34 1591.36,2869.34 1756.84,3034.82 1756.84,3052.31 1768.17,3063.64 U2.11@1793.14,3063.64
PC3: U2.12
PC4: U2.24
PC5: U2.25
PC6: U2.39
PC7: U2.40
PC8: U2.41
PC9: U2.42
PC10: P15.2 U2.54 | length 2359.1
  Top Layer w8: P15.2@349.55,3348.48 451.36,3450.3 v2(604.02,3450.3) ; U2.54@2044.41,3253.32 2044.41,3595.96 v2(2046.49,3598.05)
  Bottom Layer w8: v2(604.02,3450.3) 604.02,3453.65 615.36,3464.98 615.36,3617.08 707.03,3708.75 946.57,3708.75 983.27,3745.45 1289.14,3745.45 1324.03,3710.56 1329.01,3710.56 1414.94,3624.63 2019.91,3624.63 v2(2046.49,3598.05)
PC11: P15.4 U2.55 | length 2380.9
  Top Layer w8: P15.4@349.55,3248.48 488.77,3387.7 v2(609.56,3387.7) ; v2(2003.92,3592.72) 2028.66,3567.98 U2.55@2028.66,3253.32
  Bottom Layer w8: v2(609.56,3387.7) 630.75,3408.89 630.75,3612.68 712.83,3694.75 952.37,3694.75 989.07,3731.45 1283.34,3731.45 1422.07,3592.72 v2(2003.92,3592.72)
PC12: U2.56
PC13: U2.2 U3.15 | length 511.5
  Top Layer w8: U3.15@1596.43,3057.33 1596.43,3018.86 1603.91,3011.38 v1(1603.91,3010.12) ; v1(1722.7,3261.7) 1722.7,3247.88 1765.21,3205.37 U2.2@1793.14,3205.37
  Bottom Layer w8: v1(1603.91,3010.12) 1685.57,3010.12 1735.62,3060.17 1735.62,3245.41 1722.7,3258.34 v1(1722.7,3261.7)
PD2: U2.57
PD3: U2.66
PD4: U2.18
PD5: U2.33
PD6: U2.34
S1A: U3.16 Y1.3 | length 311.5
  Top Layer w8: Y1.3@1364.1,3060.39 1377.51,3046.98 1384.86,3054.33 v1(1405.45,3054.33) ; U3.16@1616.11,3057.33 1616.11,3046.93 1627.77,3035.26 v1(1630,3035.26)
  Bottom Layer w8: v1(1405.45,3054.33) 1424.52,3035.26 v1(1630,3035.26)
S1B: U3.3 Y1.1 | length 330.2
  Top Layer w8: Y1.1@1454.65,3135.19 1457.92,3135.19 1482.41,3110.71 v1(1482.41,3110.04) ; U3.3@1646.67,3127.26 1672.76,3127.26 v1(1686.37,3140.87)
  Bottom Layer w8: v1(1482.41,3110.04) 1518.1,3074.34 1619.85,3074.34 v1(1686.37,3140.87)
S2A: U3.1 Y3.3 | length 448
  Top Layer w8: Y3.3@1456.34,3292.9 1460.27,3292.9 1487.54,3265.63 v1(1489.99,3265.63) ; U3.1@1646.67,3087.89 1647.25,3087.31 1662.67,3087.31 1672.59,3077.39 v1(1676.29,3077.39)
  Bottom Layer w8: v1(1489.99,3265.63) 1553.5,3202.12 1682.29,3202.12 1710.37,3174.04 1710.37,3111.47 v1(1676.29,3077.39)
S2B: U3.4 Y3.1 | length 355.2
  Top Layer w8: Y3.1@1365.79,3218.09 1378.21,3218.09 1396.18,3200.12 v1(1398.59,3200.12) ; U3.4@1646.67,3146.94 1657.07,3146.94 1662.91,3152.78 1662.91,3171.46 v1(1663.64,3172.19)
  Bottom Layer w8: v1(1398.59,3200.12) 1426.51,3172.19 v1(1663.64,3172.19)
V5V: C1.1 S1.2 U1.3 | length 390.2
  Top Layer w30: S1.2@1335.43,4283.12 1335.43,4189.64 1356.88,4168.19 C1.1@1356.88,4090.34 1370.34,4076.88 1370.34,3916.69 U1.3@1376.91,3910.12
VBAT: C6.1 P14.6 U2.1 | length 2188.8
  Top Layer w8: C6.1@1698.84,3355.12 1698.84,3326.46 1751.25,3274.05 1751.25,3239.12 1769.26,3221.12 1781.46,3221.12 U2.1@1793.14,3221.12
  Top Layer w20: v2(1355.42,3444.12) 1426.15,3514.85 1610.43,3514.85 1659.79,3465.49 1659.79,3375.15 1671.51,3363.43 1690.54,3363.43 C6.1@1698.84,3355.12
  Top Layer w25: P14.6@349.55,4015.15 398.2,4015.15 725.72,3687.63 854.6,3687.63 909.85,3632.38 v2(909.85,3414.72) v2@909.85,3380.35
  Bottom Layer w25: v2(1355.42,3444.12) 1326.02,3414.72 948.39,3414.72 ; 948.39,3414.72 913.84,3380.17 913.03,3380.17 912.94,3380.26 912.94,3414.63 912.85,3414.72 948.39,3414.72
  other v2: 910.03,3380.17
VDD: C4.1 C10.2 P13.7 P13.8 P14.4 P15.7 P15.8 P16.1 P16.2 S2.1 U2.32 U2.68 | length 6989.3
  Top Layer w8: v2@1781.03,3336.56 1823.94,3293.65 U2.68@1823.94,3253.32 ; U2.32@2044.41,2936.96 2044.47,2936.89 2044.47,2899.9 2056.76,2887.61 2086.19,2887.61 v2(2117.6,2856.2) 2117.6,2830.43 C10.2@2117.91,2830.12
  Top Layer w20: S2.1@141.31,2337.49 345.85,2542.03 345.85,3044.78 P15.8@349.55,3048.48
  Top Layer w25: P15.7@249.55,3048.48 P15.8@349.55,3048.48 534.96,3048.48 634.15,3147.67 871.76,3147.67 904.96,3180.88 904.96,3281.55 883.32,3303.19 848.45,3303.19 P13.8@843.16,3308.48 P13.7@743.16,3308.48 742.88,3308.2 586.48,3308.2 ; P14.4@349.55,4115.15 643.16,4115.15 P16.1@743.16,4215.15 P16.2@843.16,4215.15 ; 579.38,3308.2 578.7,3307.53 552.86,3307.53 ; 552.86,3307.53 519.09,3273.76 v2(518.28,3273.76) 518.28,3274.57 521.27,3277.56 v2(521.27,3307.53) 552.86,3307.53
  Bottom Layer w20: P15.8@349.55,3048.48 567.08,2830.95 649.42,2748.61 1366.97,2748.61 1417.05,2798.69 1887.39,2798.69 1922.49,2763.58 2057.45,2763.58 2116.07,2822.21 2116.07,2854.67 v2(2117.6,2856.2)
  Bottom Layer w25: v2(518.28,3273.76) 521.27,3276.75 v2(521.27,3307.53) 521.27,3993.27 P16.1@743.16,4215.15 ; P13.8@843.16,3308.48 980.3,3308.48 1023.89,3352.08 1363.98,3352.08 1464.07,3452.16 1756.23,3452.16 1781.5,3426.88 1781.5,3339.16 1781.22,3338.88 1781.22,3336.76 v2(1780.65,3336.18)
VDDA: C18.1 R22.2 U2.13 | length 431.3
  Top Layer w8: C18.1@1662.18,2870.12 1693.83,2901.77 1693.83,2948.52 1767.39,3022.09 1767.39,3022.17 1777.31,3032.08 U2.13@1793.14,3032.15 U2.13@1793.14,3032.15
  Top Layer w20: R22.2@1481.72,2829.06 1481.72,2828.94 1490.02,2820.63 1601.89,2820.63 1652.89,2871.63 1654.4,2870.12 C18.1@1662.18,2870.12
VINTA: C7.1 U2.50 | length 142.8
  Top Layer w8: U2.50@2106.7,3205.37 2221.65,3205.37 2225.61,3201.41 2226.6,3201.41 2240.91,3187.11 C7.1@2240.91,3186.12
VIO: C5.2 C8.1 C9.1 P14.2 R22.1 U2.17 U2.31 U2.67 | length 5455.5
  Top Layer w8: v2@1734.82,2897.7 1739.12,2902.01 1739.12,2934.05 1774.22,2969.15 U2.17@1793.14,2969.15 ; C5.2@1829.91,3355.12 1839.69,3345.34 U2.67@1839.69,3253.32 ; U2.31@2028.66,2936.96 2028.66,2885.55 v2(2058.48,2855.73)
  Top Layer w20: v2(1020.46,3209.41) v2@1021.55,3209.41 ; v2(1246.23,3230.42) v2@1246.52,3230.71 ; v2(1302.24,2804.7) 1301.4,2805.54 1233.7,2805.54 1086.94,2952.3 1086.94,3145.43 1048.06,3184.31 ; v2@1302.24,2805.54 v2@1341.57,2805.54 ; v2(1341.57,2804.7) 1364.65,2827.78 1412.78,2827.78 1414.06,2829.06 R22.1@1421.09,2829.06 ; C5.2@1829.91,3355.12 1835.51,3360.73 1863.72,3360.73 1875.58,3372.59 1875.58,3476.66 1804.05,3548.19 1370.78,3548.19 1281.29,3458.7 1281.29,3265.48 1280.62,3264.81 ; 1048.06,3184.31 1046.65,3184.31 1021.57,3209.38 1049.44,3209.38 1049.46,3184.31 1048.06,3184.31 ; v2@1246.52,3230.71 1280.62,3264.81 ; v2@1246.52,3230.71 1280.33,3230.71 v2(1280.62,3231) 1280.62,3264.81
  Bottom Layer w20: v2(1020.46,3209.41) 1049.41,3209.41 1049.46,3209.36 1050.37,3209.36 1068.18,3227.17 1240.81,3227.17 1242.54,3228.89 1244.51,3228.89 1246.23,3227.17 1247.95,3228.89 1253.42,3228.89 1254.85,3227.46 1274.91,3227.46 1276.92,3229.47 v2@1278.41,3227.98
  Bottom Layer w25: P14.2@349.55,4215.15 351.96,4212.74 392.6,4212.74 459.19,4146.14 459.19,3104.07 687.83,2875.43 1182.37,2875.43 1253.1,2804.7 v2(1302.24,2804.7) v2(1341.57,2804.7) 1382.74,2845.87 1702.54,2845.87 1737.94,2881.27 1737.94,2892.17 1738.75,2892.98 1739.9,2892.98 1745.36,2887.52 1850.32,2887.52 1934.29,2803.56 2006.3,2803.56 v2(2058.48,2855.73)
  other v2: 1738.51,2893.56 1052.46,3209.36
X32IN: C13.2 U2.3 Y2.1 | length 388.1
  Top Layer w8: C13.2@1575.81,3480.81 C13.2@1586.82,3469.79 ; C13.2@1596.33,3456.99 Y2.1@1596.33,3370.02 1604.74,3361.61 1604.74,3337.7 1752.81,3189.63 U2.3@1793.14,3189.63
X32OUT: C14.2 U2.4 Y2.2 | length 396.2
  Top Layer w8: C14.2@1516.64,3401.29 1516.64,3400.31 1530.94,3386 1531.93,3386 1543.89,3374.04 1543.89,3324.04 Y2.2@1596.33,3271.59 ; Y2.2@1603.74,3279 1604.86,3277.88 1638.65,3277.88 1742.65,3173.88 U2.4@1793.14,3173.88
XIN: U2.6 U3.5 | length 218.6
  Top Layer w8: U3.5@1616.11,3177.5 1616.11,3193.84 1620.8,3198.53 1671.63,3198.53 1727.77,3142.38 U2.6@1793.14,3142.38
XOUT: U2.7 U3.2 | length 154.4
  Top Layer w8: U3.2@1646.67,3107.57 1689.42,3107.57 1708.48,3126.63 U2.7@1793.14,3126.63
pads on no net: J1.A8 J1.B8 S1.0 S1.3 U1. U3.7 U3.8 U3.9 U3.10 U3.11 U3.12

## Polygon pours and split planes (outlines as drawn)
GND on Top Layer "GND" (hatched Horizontal grid 8 track 8, remove dead copper, pour order 0): -4.26,1969.52 2502.18,1969.52 2502.18,3097.75 2502.18,4438.27 0,4438.27 0,4319.94
GND on Bottom Layer "GND" (hatched Horizontal grid 8 track 8, remove dead copper, pour order 1): -3.26,1969.52 2465.92,1969.52 2465.92,3097.75 2465.92,4438.27 1,4438.27 1,4319.94

## Keep-outs
Keep-Out Layer:
  lines w10: 0,118.11 0,4319.94 cw(c118.33,4319.94) 118.33,4438.27 2637.8,4438.27 cw(c2637.8,4320.16) 2755.91,4320.16 2755.91,118.11 ; 0.16,118.11 ccw(c118.27,118.11) 118.27,0 2637.96,0 ccw(c2637.96,118.11) 2756.07,118.11

## Other copper
Top Layer:
  rectangle net GND: 2173.96,3309.11 2270.21,3396
  rectangle net GND: 2431.33,3203.66 2481.91,3239.09
  rectangle net GND: 2389.76,3143.95 2469.94,3256.12
  pour cut-out: 1809.01,3236.17 1809.02,2964.88 2084.4,2964.88 2084.4,3236.17
  pour cut-out: 2279.4,3256.82 2279.4,3303.87 2354.42,3303.87 2354.42,3256.72
Bottom Layer:
  rectangle net GND: 1554.66,3092.34 1612.39,3128.82
  rectangle net GND: 1868.44,3021.39 2019.9,3179.93
Multi-Layer:
  pour cut-out: 2465.94,1937.52 2465.94,4438.27 2755.91,4438.27 2755.91,1937.5
  pour cut-out: 0,-2.26 0,1977.15 2755.91,1977.15 2755.91,-2.26

## Silkscreen, mask and mechanical layers (free items; w line width, h text height)
Top Overlay:
  circle w30: c1460.32,784.67 r10
  lines w20: 1106.77,431.12 cw(c1460.32,784.67) 1106.77,1138.22 ; 1177.48,501.83 cw(c1460.32,784.67) 1177.48,1067.51 ; 1248.19,572.54 cw(c1460.32,784.67) 1248.19,996.8 ; 1318.9,643.25 cw(c1460.32,784.67) 1318.9,926.09 ; 1389.61,713.96 cw(c1460.32,784.67) 1389.61,855.38 ; 1531.03,713.96 ccw(c1460.32,784.67) 1531.03,855.38 ; 1601.74,643.25 ccw(c1460.32,784.67) 1601.74,926.09 ; 1672.45,572.54 ccw(c1460.32,784.67) 1672.45,996.8 ; 1743.16,501.83 ccw(c1460.32,784.67) 1743.16,1067.51 ; 1813.87,431.12 ccw(c1460.32,784.67) 1813.87,1138.22
  text "ON" at 1299.81,4378.65 h35
  text "OFF" at 1435.98,4378.65 h35
  text "3V3" at 80.8,4197.89 h35
  text "VIO" at 407.87,4196.64 h35
  text "VDD" at 582.13,4191.69 h35
  text "VDD" at 902.68,4191.69 h35
  text "VDD" at 407.87,4091.53 h35
  text "BOOT1" at 523.82,4090.97 h35
  text "BOOT0" at 902.68,4090.97 h35
  text "3V3" at 75.79,4085.28 h35
  text "3V3" at 80.8,3991.44 h35
  text "VBAT" at 407.87,3991.44 h35
  text "GND" at 582.13,3990.25 h35
  text "GND" at 902.68,3990.25 h35
  text "PC1" at 593.8,3889.53 h35
  text "LED1" at 902.68,3889.53 h35
  text "VCC" at 81.42,3807.46 h35
  text "GND" at 412.09,3807.46 h35
  text "PC2" at 582.13,3788.81 h35
  text "LED2" at 902.68,3788.81 h35
  text "VCC" at 81.42,3706.81 h35
  text "GND" at 412.09,3706.81 h35
  text "VCC" at 81.42,3606.15 h35
  text "GND" at 412.09,3606.15 h35
  text "SWCK" at 539.33,3584.87 h35
  text "TXD" at 905.01,3584.87 h35
  text "VCC" at 81.42,3505.49 h35
  text "GND" at 412.09,3505.49 h35
  text "SWIO" at 545.16,3484.35 h35
  text "RXD" at 905.01,3484.35 h35
  text "GND" at 574.32,3383.83 h35
  text "GND" at 905.01,3383.83 h35
  text "PA2" at 76.14,3328.43 h35
  text "PC10" at 412.58,3328.43 h35
  text "VDD" at 574.32,3283.31 h35
  text "VDD" at 905.01,3283.31 h35
  text "PA3" at 76.14,3228.06 h35
  text "PC11" at 412.58,3228.06 h35
  text "+5V" at 574.32,3182.79 h35
  text "+5V" at 905.01,3182.79 h35
  text "GND" at 76.14,3127.69 h35
  text "GND" at 412.58,3127.69 h35
  text "VDD" at 76.14,3027.31 h35
  text "VDD" at 412.58,3027.31 h35
  text "CH32V208W-NFC-R0-1v5" at 1767.23,2475.28 h35
Mechanical 1:
  lines w10: 0,118.11 0,4320.16 cw(c118.11,4320.16) 118.11,4438.27 2637.8,4438.27 cw(c2637.8,4320.16) 2755.91,4320.16 2755.91,118.11 ; 0.16,118.11 ccw(c118.27,118.11) 118.27,0 2637.96,0 ccw(c2637.96,118.11) 2756.07,118.11

## Text inside footprints (layer, text, board x,y; h text height)
D1: Top Overlay "+" at 1092.2,3795.13 h40 r90
D2: Top Overlay "+" at 1093.58,3440.47 h40 r90
D3: Top Overlay "+" at 1093.58,3352.8 h40 r90